# Altium PCB AS5047P.PcbDoc
Units mil, origin at the board's own origin, x right, y up, seen from the top; angles counter-clockwise.
Board outline 1649.61 x 1649.61 mil, 2 copper layers (Top Layer, Bottom Layer); 12 components, 15 nets, 56 pads, 2 vias.
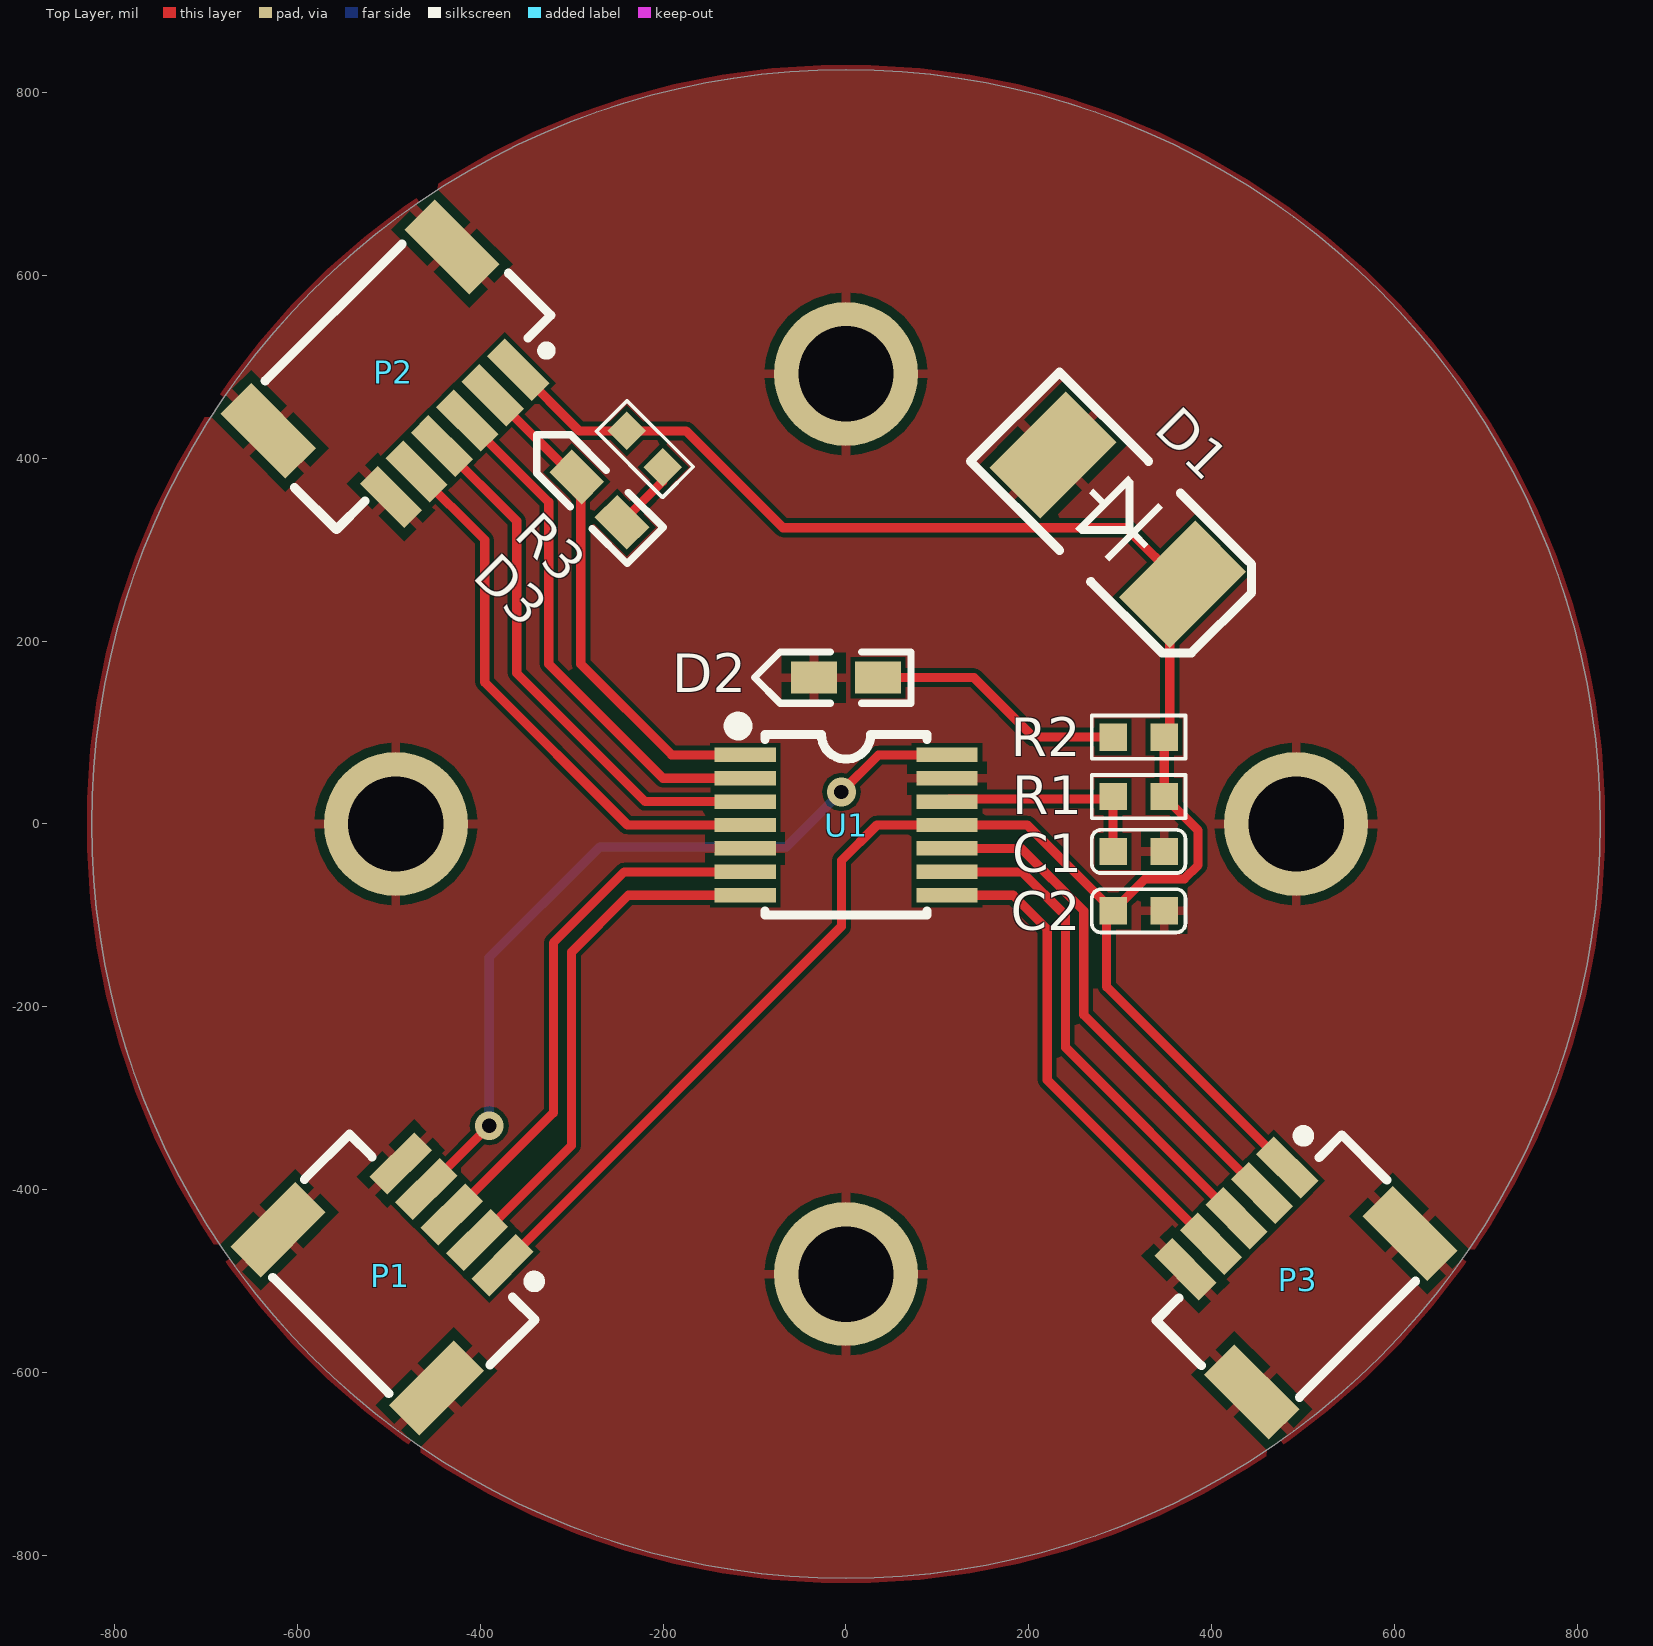
[diagram p0: Top Layer view]
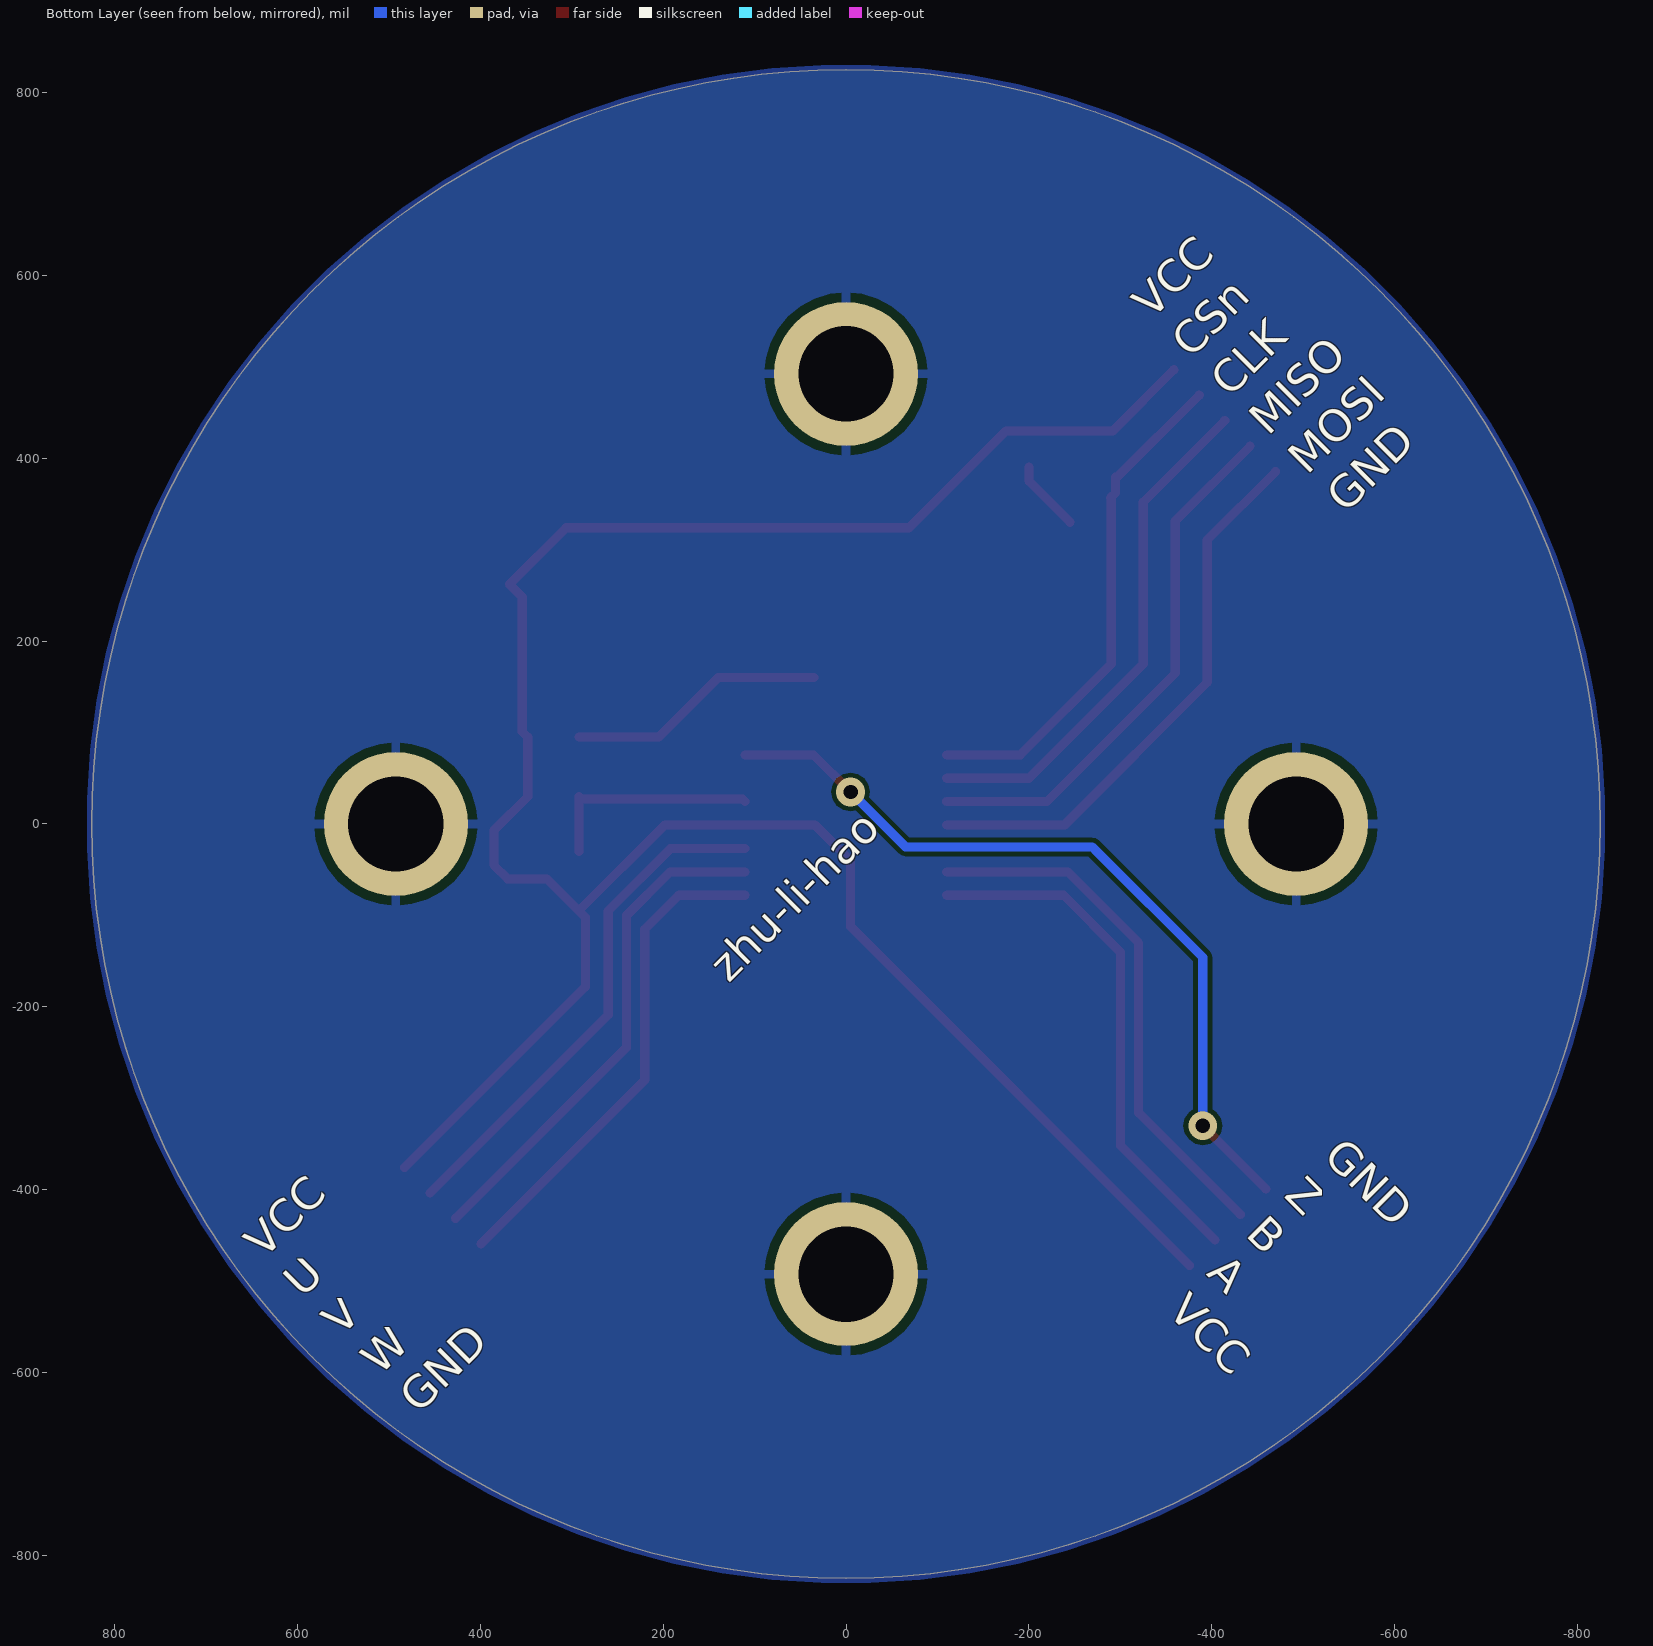
[diagram p1: Bottom Layer view, seen from below]
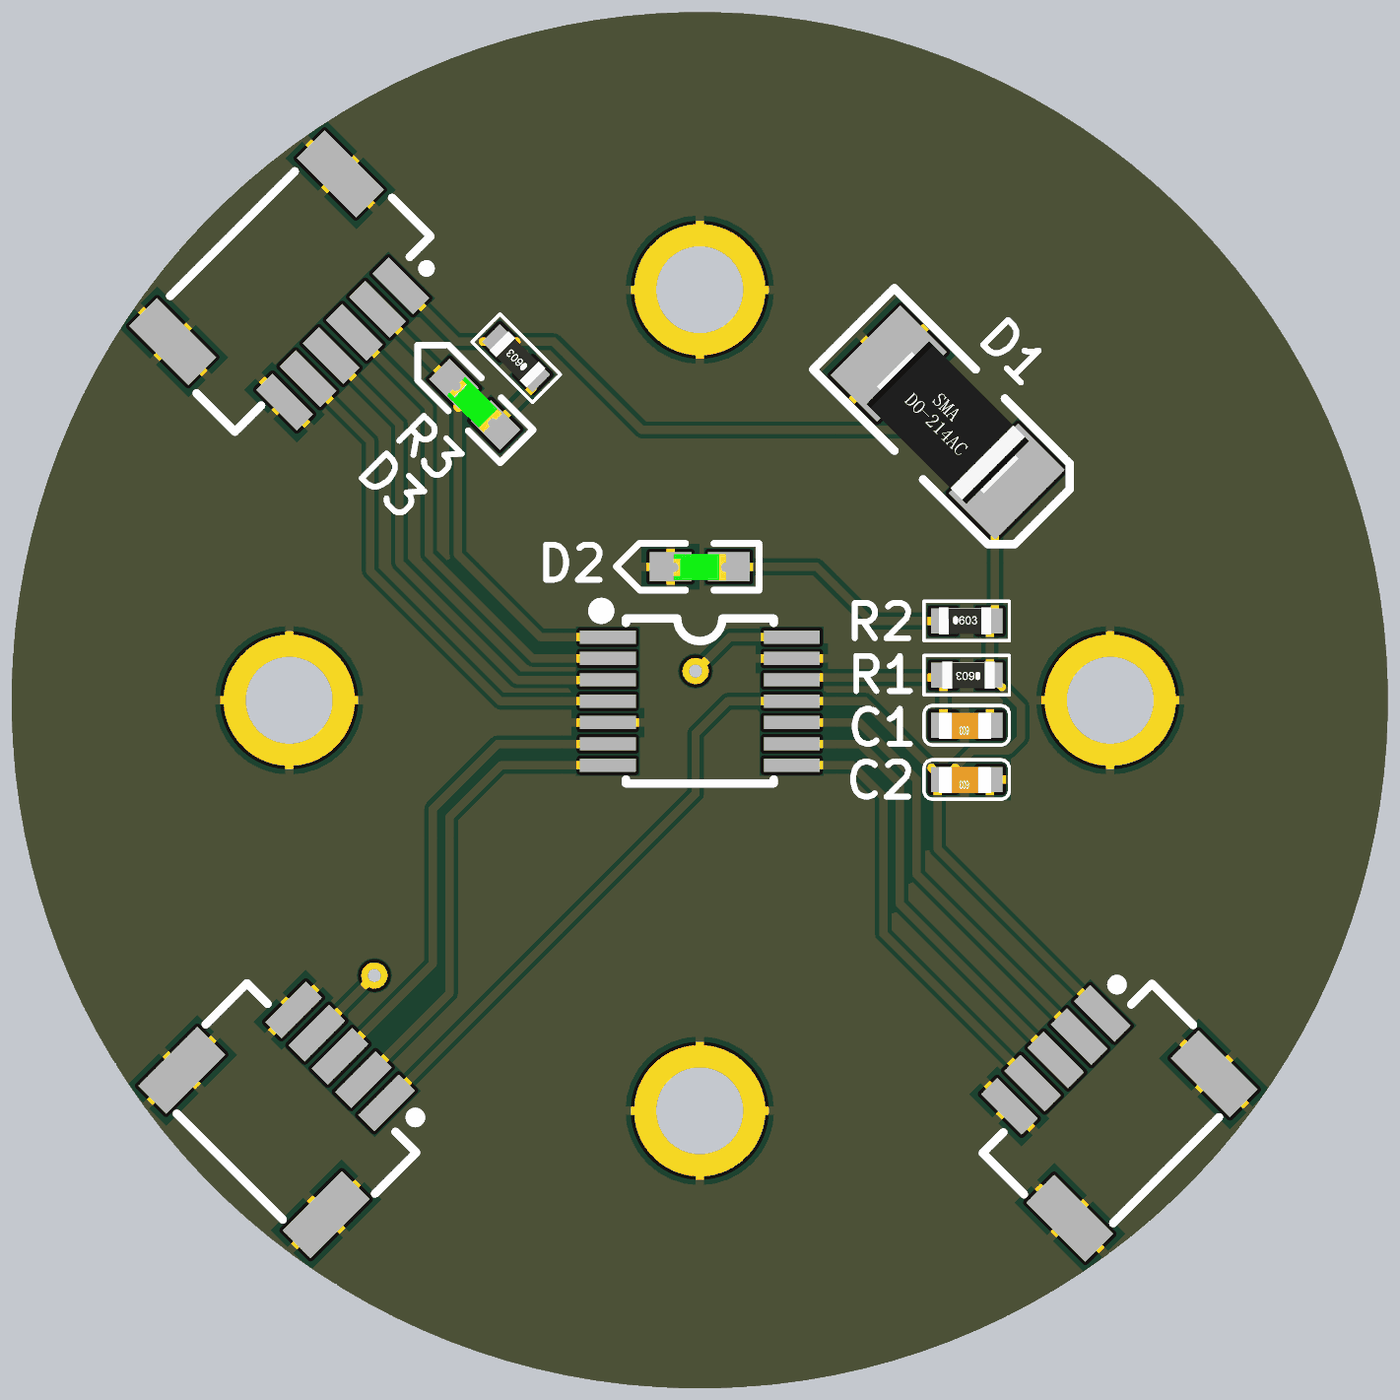
[diagram p2: 3D render of the assembled board from above, using the file's embedded part models]

## Layer stack, top to bottom
Top Solder: solder mask 0.4, Solder Resist, Dk 3.5
Top Layer: signal copper 1.4
Dielectric 1: dielectric 12.6, FR-4, Dk 4.8
Bottom Layer: signal copper 1.4
Bottom Solder: solder mask 0.4, Solder Resist, Dk 3.5

## Board outline
-824.8,0 ccw(c0,0) 0,-824.8 ccw(c0,0) 824.8,0 ccw(c0,0) 0,824.8 ccw(c0,0)

## Design rules (kind name [scope] priority, off if disabled: settings)
Clearance [All] p1: gap=5 ignorepadtopadclearanceinfootprint=FALSE except(0: Arc-Hole Track-Hole SMDPad-Hole THPad-Hole Via-Hole Fill-Hole Poly-Hole Region-Hole Text-Hole)
PolygonConnect [All] p1: connectstyle=Relief reliefconductorwidth=10 reliefentries=4 polygonreliefangle="90 Angle" airgapwidth=10
RoutingVias [All] p1: holewidth=28 width=50 viastyle="Through Hole" minholewidth=15.75 minwidth=15.75 maxholewidth=28 maxwidth=50
SolderMaskExpansion [All] p1: expansion=4 istentingtop=FALSE
Width [All] p1: maxlimit=10 minlimit=10 preferedwidth=10
30 further rules are at their usual default settings.

## Classes and differential pairs
component class AS5047P: C1 C2 D1 D2 D3 P1 P3 R1 R2 R3 U1

## Components (designator, comment, footprint, x,y, rotation, side; value= is the part's Value field where it differs from the comment)
C1 "1U" 0603C 320,-30 r180 top
C2 "100n" 0603C 320,-95 r180 top
D1 "SMAJ5.0A" SMA/DO-214AC 230,400 r315 top
D2 "LED-BLUE" LED-0603B 35,160.26 r180 top
D3 "LED-GREEN" LED-0603G -244.82,330.18 r135 top
P1 "SH1.0 5P" "SH1.0 5P" -495,-485 r135 top
P2 "SH1.0 6P" "SH1.0 6P" -485,485 r225 top
P3 "SH1.0 5P" "SH1.0 5P" 485,-495 r225 top
R1 "0R" 0603RH 320,30 r180 top
R2 "1K" 0603RH 320,95 r0 top
R3 "1K" 0603RH -220,410 r135 top
U1 "AS5047P" AS5047P 5,-5 r270 top

## Footprints (in the part's own frame and the unit in brackets; to place one, negate y for a bottom-side part, rotate by r counter-clockwise, add the part's x,y. Pads: shape width x height; smd on the part's side, far side on the other; paste and mask are expansions set on the pad)
0603C [mil]
  rect 29.92x29.92 smd: 1(-27.95,0) 2(27.95,0)
  silkscreen extent -51,-24 51,24, body extent -29,-15 34,17, height 12
0603RH [mil]
  rect 29.92x29.92 smd: 1(27.95,0) 2(-27.95,0)
  silkscreen extent -51,-24 51,24, body extent -34,-16 29,16, height 18
AS5047P [mm] "AS5047P SSOP-14"
  rect 0.4x1.7 smd: 1(-2.048,-2.925) 2(-1.398,-2.925) 3(-0.748,-2.925) 4(-0.098,-2.925) 5(0.552,-2.925) 6(1.202,-2.925) 7(1.852,-2.925) 8(1.852,2.675) 9(1.202,2.675) 10(0.552,2.675) 11(-0.098,2.675) 12(-0.748,2.675) 13(-1.398,2.675) 14(-2.048,2.675)
  silkscreen extent -3.05,-3.32 2.4,2.12
LED-0603B [mil]
  rect 50x35 smd: A(0,0.26) K(70,0.26)
  silkscreen extent -36,-28 135,28, body extent 4,-15 66,17, height 24
LED-0603G [mil]
  rect 50x35 smd: A(0,0.26) K(70,0.26)
  silkscreen extent -36,-28 134,28, body extent 4,-15 66,17, height 24
"SH1.0 5P" [mm] "SH1.0 5P 卧贴"
  rect 0.7x1.75 smd: 1(-2.103,-2.191) 2(-1.103,-2.191) 3(-0.103,-2.191) 4(0.897,-2.191) 5(1.897,-2.191)
  rect 1.2x2.55 smd: 6(3.007,1.519) 7(-3.213,1.519)
  silkscreen extent -3.81,-2.64 3.48,2.56
"SH1.0 6P" [mm] "SH1.0 6P 卧贴"
  rect 0.7x1.75 smd: 1(-2.484,2.064) 2(-1.484,2.064) 3(-0.484,2.064) 4(0.516,2.064) 5(1.516,2.064) 6(2.516,2.064)
  rect 1.2x2.55 smd: 7(3.626,-1.646) 8(-3.594,-1.646)
  silkscreen extent -4.19,-2.69 4.22,2.37
SMA/DO-214AC [mm] "塑封二极管"
  rect 2x3 smd: A(-0.127,0) K(4.953,0)
  silkscreen extent -1.63,-1.75 6.48,1.75, body extent 0.11,-1.35 4.71,1.35, height 2.4

## Part data
C1 C2: library part CAP, "无极性电容"
D1: library part DIODE, "普通二极管"
D2 D3: library part LED
P1 P3: "SH1.0 5P 卧贴"
P2: "SH1.0 6P 卧贴"
R1 R2 R3: library part RES
U1: "AS5047P SSOP14"

## Free pads (board coordinates)
  round 157.48 hole 104.33: 5(-492.13,0) 6(492.13,0) 8(0,492.13) 10(0,-492.13)

## Via types
v1: diameter 31.5, hole 15.75, Top Layer to Bottom Layer, 2 vias

## Nets (pads, with @x,y where several pads share a name; then routed paths per layer and width w, separated by ;. In a path a pad name is that pad's centre, name@x,y a point inside that pad or via, vN(x,y) a via of type N, cw(c..) or ccw(c..) an arc to the next point about the centre after c; other vN are vias at no path point)
A: P1.2 U1.7 | length 573
  Top Layer w10: P1.2 -300,-351.41 -300,-140 -237.91,-77.91 U1.7
B: P1.3 U1.6 | length 584.9
  Top Layer w10: P1.3 -320,-315.73 -320,-130 -242.32,-52.32 U1.6
CLK: P2.3 U1.2 | length 569.5
  Top Layer w10: P2.3 -325,351.95 -325,175 -200.04,50.04 U1.2
CSn: D3.K P2.2 U1.1 | length 556.8
  Top Layer w10: P2.2 -296.87,379.5 D3.K -294.5,361.82 -289.19,356.52 -290,355.71 -290,175 -190.63,75.63 U1.1
GND: C1.1 C2.1 D1.A D2.K P1.5 P1.6 P1.7 P2.6 P2.7 P2.8 P3.5 P3.6 P3.7 pad.5 pad.6 pad.8 pad.10 U1.5 U1.13
MISO: P2.4 U1.3 | length 590.1
  Top Layer w10: P2.4 -360,331.27 -360,165 -219.45,24.45 U1.3
MOSI: P2.5 U1.4 | length 610.8
  Top Layer w10: P2.5 -395,310.59 -395,155 -238.86,-1.14 U1.4
NetC1_2: C1.2 R1.1 U1.12 | length 244
  Top Layer w10: U1.12 113.08,27.23 289.28,27.23 R1.1 C1.2
NetD2_A: D2.A R2.2 | length 284
  Top Layer w10: D2.A 140,160 205,95 R2.2
NetD3_A: D3.A R3.2 | length 78.8
  Top Layer w10: D3.A -200.24,374.76 R3.2
U: P3.2 U1.10 | length 566.9
  Top Layer w10: U1.10 191.73,-26.73 260,-95 260,-208.59 P3.2
V: P3.3 U1.9 | length 558
  Top Layer w10: U1.9 192.32,-52.32 240,-100 240,-244.27 P3.3
VCC: C2.2 D1.K P1.1 P2.1 P3.1 R1.2 R2.1 R3.1 U1.11 | length 2581
  Top Layer w10: P1.1 -5,-112.09 -5,-40 33.86,-1.14 U1.11 198.19,-1.14 C2.2 ; P2.1 -291.46,429.76 R3.1 -174.76,429.76 -68.94,323.94 306.06,323.94 D1.K 353.97,248.19 353.97,101.02 R2.1 347.95,30 385,-7.05 385,-45 370,-60 327.05,-60 C2.2 ; P3.1 285,-177.91 285,-102.05 C2.2
W: P3.4 U1.8 | length 543.2
  Top Layer w10: U1.8 182.91,-77.91 220,-115 220,-279.94 P3.4
Z: P1.4 U1.14 | length 873.8
  Top Layer w10: P1.4 v1(-390,-330) ; v1(-5,35.03) 35.6,75.63 U1.14
  Bottom Layer w10: v1(-390,-330) -390,-145.86 -275,-30.86 -269.14,-25 -65.03,-25 v1(-5,35.03)

## Polygon pours and split planes (outlines as drawn)
GND on Top Layer "GND_L01_P000" (solid, pour order 0): -829.82,0 ccw(c0,0) 0,-829.82 ccw(c0,0) 829.82,0 ccw(c0,0) 0,829.82 ccw(c0,0)
GND on Bottom Layer "GND_L02_P001" (solid, pour order 1): -829.82,0 ccw(c0,0) 0,-829.82 ccw(c0,0) 829.82,0 ccw(c0,0) 0,829.82 ccw(c0,0)

## Silkscreen, mask and mechanical layers (free items; w line width, h text height)
Bottom Overlay:
  text "VCC / CSn / CLK / MISO / MOSI / GND" at -554.86,330.26 h60 r315
  text "zhu-li-hao" at 119.84,-183.12 h60 r315
  text "GND / Z / B / A / VCC" at -342.71,-542.77 h60 r45
  text "VCC / U / V / W / GND" at 458.73,-654.33 h60 r315
Mechanical 1:
  circle w10: c0,0 r824.8